# Altium PCB Square.PcbDoc
Units mm, origin at the board's own origin, x right, y up, seen from the top; angles counter-clockwise.
Board outline 76.5 x 60.89 mm, 2 copper layers (Top Layer, Bottom Layer); 6 components, 20 nets, 52 pads, 23 vias.
Unrouted connection lines stored in the file: 2.
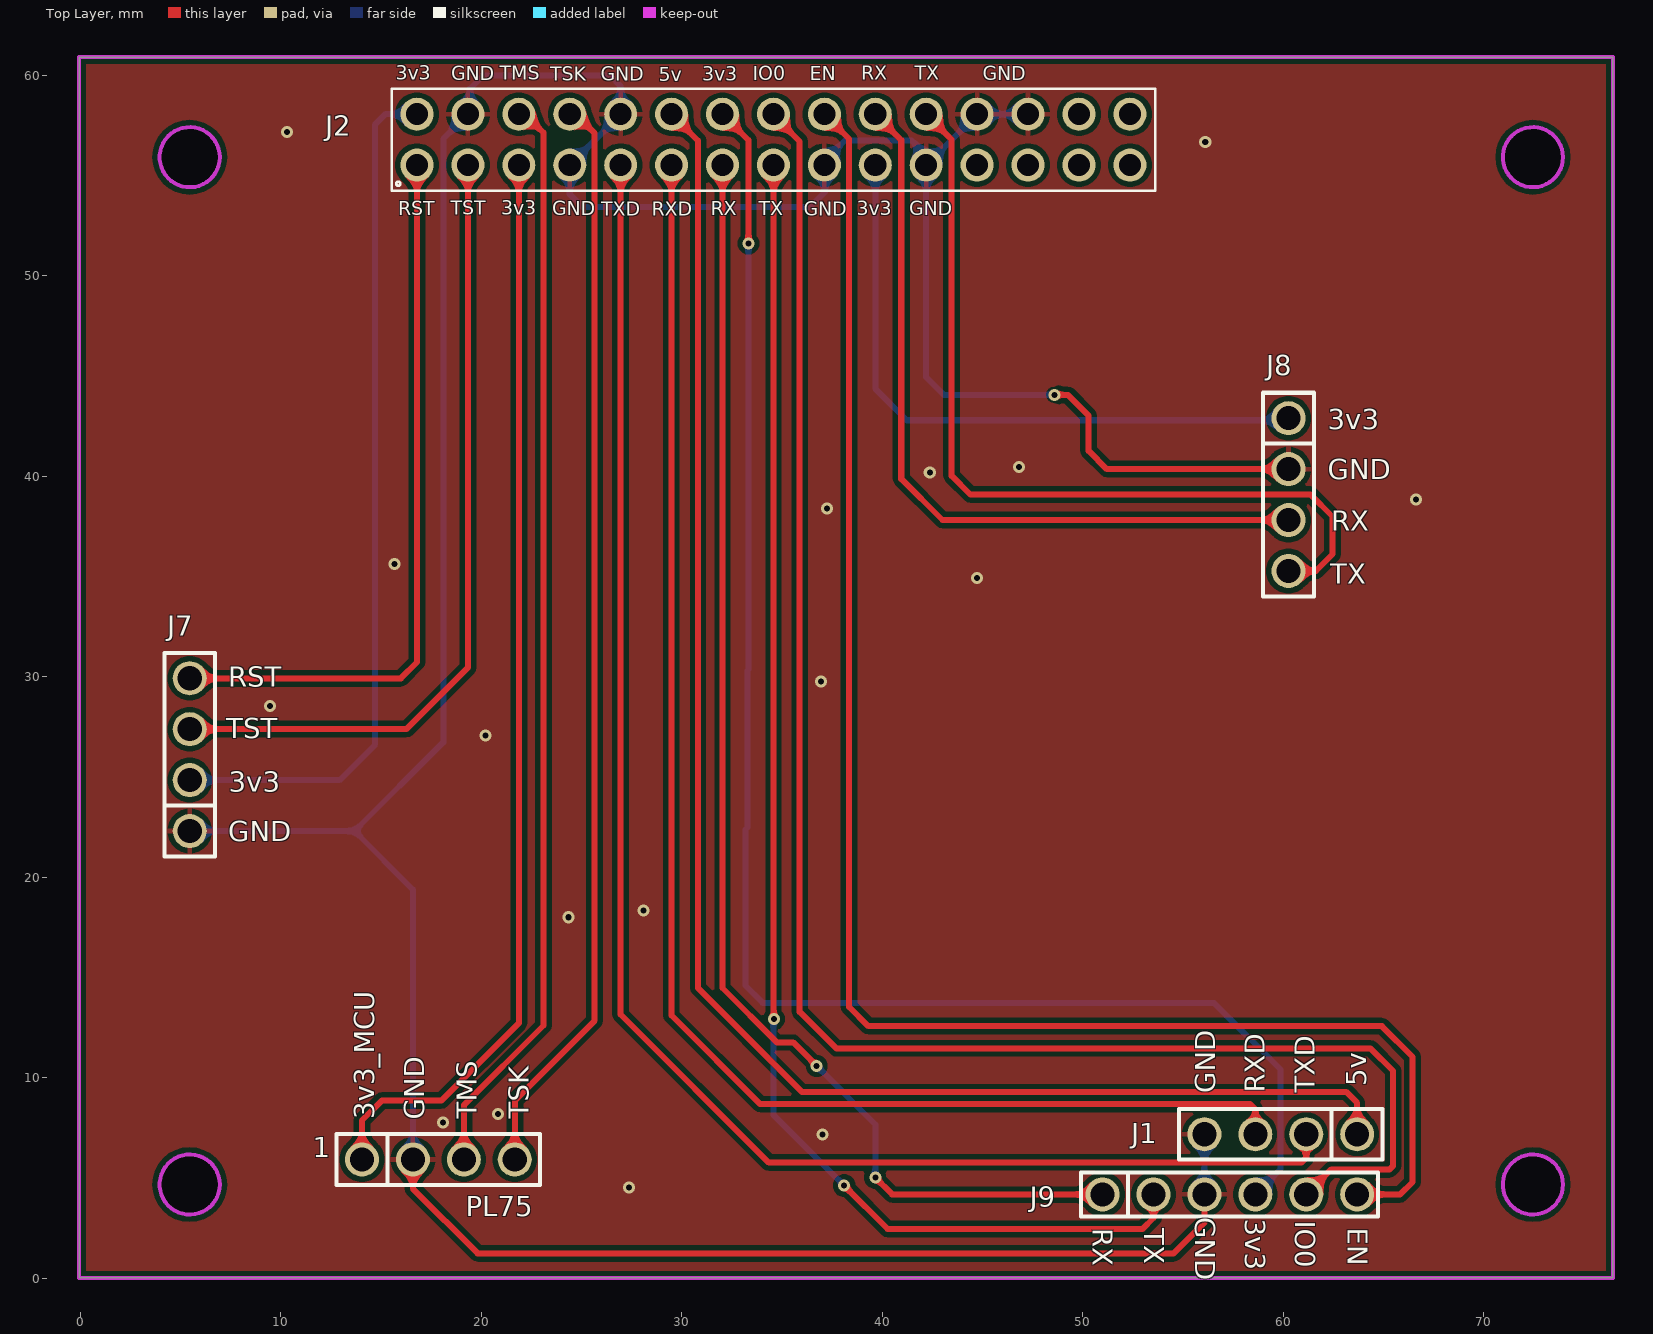
[diagram p0: Top Layer view]
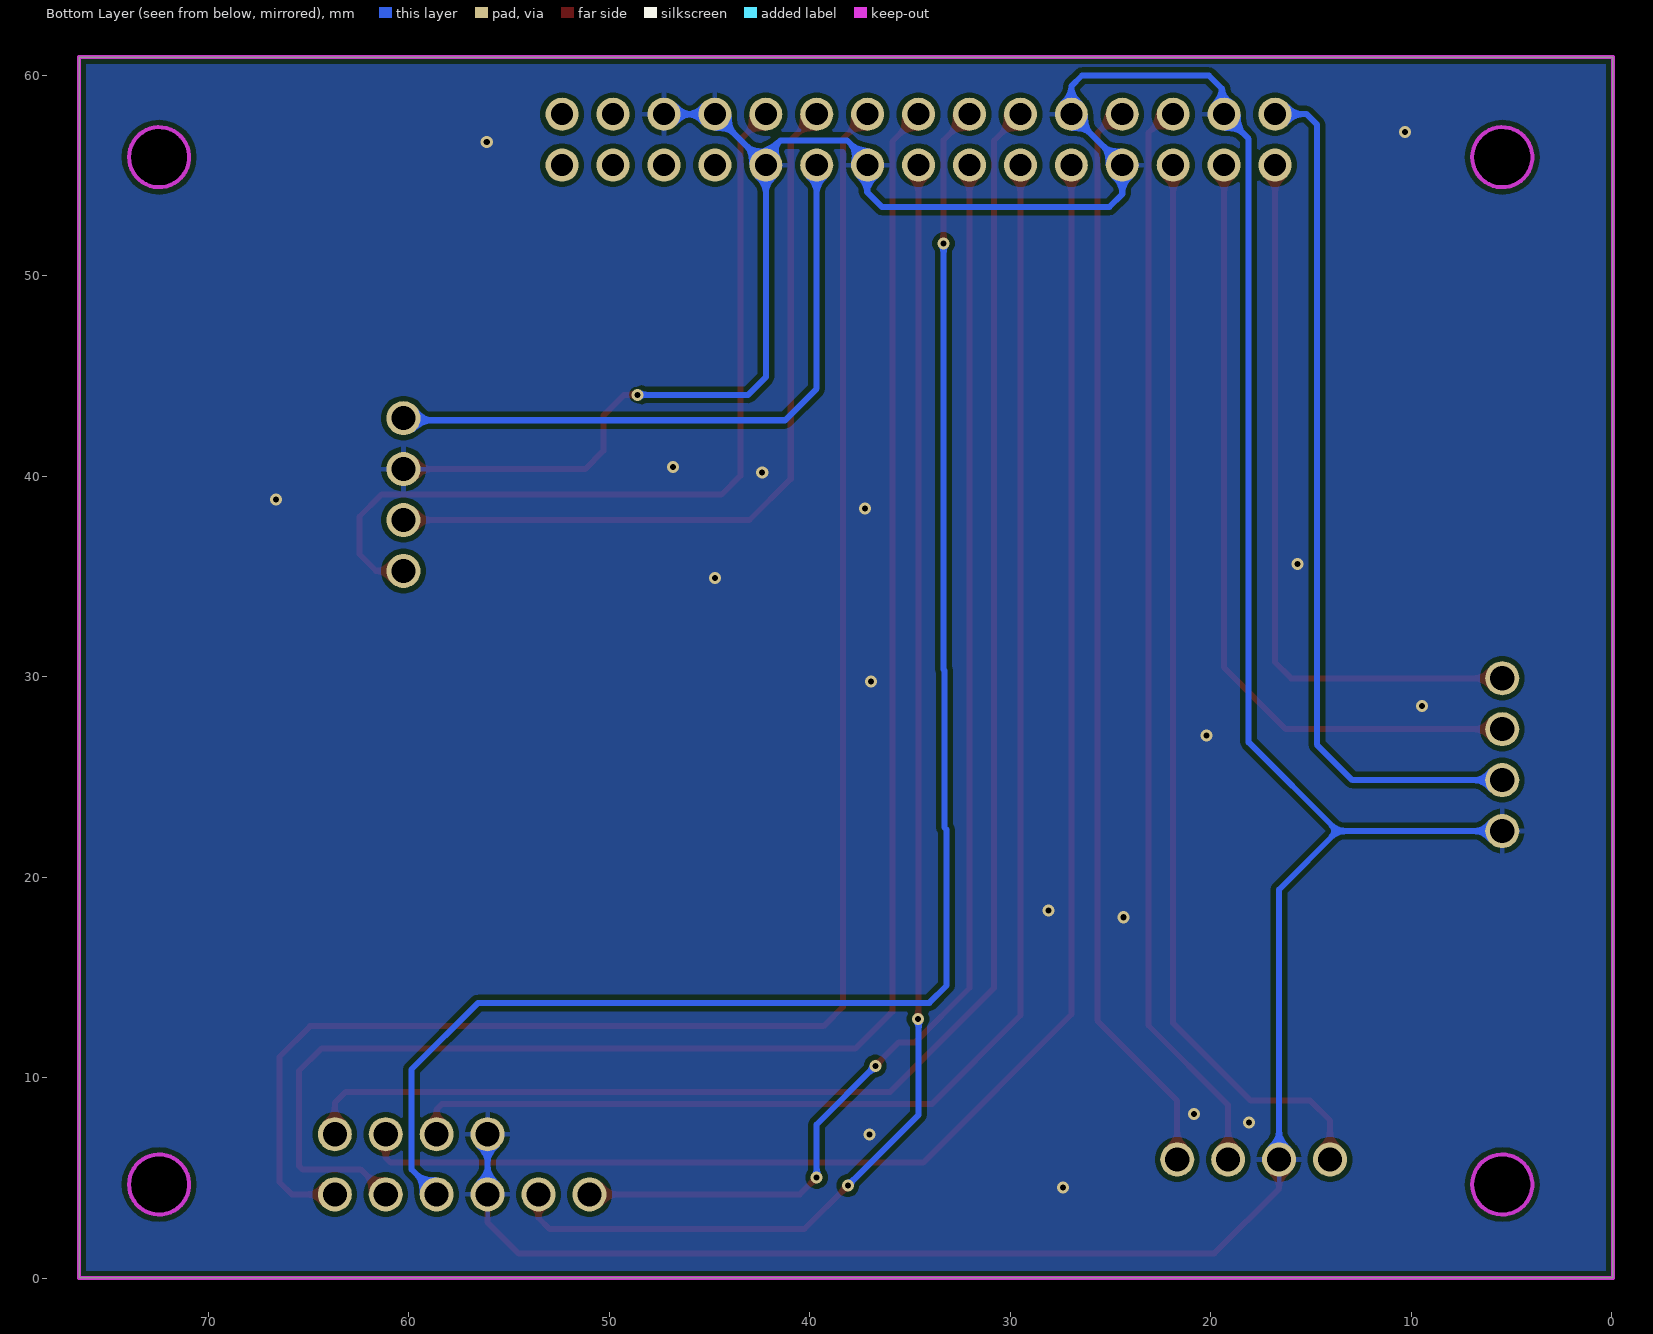
[diagram p1: Bottom Layer view, seen from below]

## Layer stack, top to bottom
Top Solder: solder mask 0.0102, Solder Resist, Dk 3.5
Top Layer: signal copper 0.0356
Dielectric 1: dielectric 0.32, FR-4, Dk 4.8
Bottom Layer: signal copper 0.0356
Bottom Solder: solder mask 0.0102, Solder Resist, Dk 3.5

## Board outline
-0.06,0.017 76.438,0.017 76.438,60.909 -0.06,60.909
cut-out: 70.952,4.676 ccw(c72.452,4.676) 72.452,3.176 ccw(c72.452,4.676) 73.952,4.676 ccw(c72.452,4.676) 72.452,6.176 ccw(c72.452,4.676)
cut-out: 70.952,55.921 ccw(c72.452,55.921) 72.452,54.421 ccw(c72.452,55.921) 73.952,55.921 ccw(c72.452,55.921) 72.452,57.421 ccw(c72.452,55.921)
cut-out: 3.952,4.676 ccw(c5.452,4.676) 5.452,3.176 ccw(c5.452,4.676) 6.952,4.676 ccw(c5.452,4.676) 5.452,6.176 ccw(c5.452,4.676)
cut-out: 5.452,54.421 cw(c5.452,55.921) 3.952,55.921 cw(c5.452,55.921) 5.452,57.421 cw(c5.452,55.921) 6.952,55.921 cw(c5.452,55.921)

## Design rules (kind name [scope] priority, off if disabled: settings)
Clearance [All] p1: gap=0.254 ignorepadtopadclearanceinfootprint=FALSE
PolygonConnect [All] p1: thpad.connectstyle=Relief thpad.reliefconductorwidth=0.254 thpad.reliefentries=4 thpad.polygonreliefangle="90 Angle" thpad.airgapwidth=0.254 smdpad.connectstyle=Relief smdpad.reliefconductorwidth=0.254 smdpad.reliefentries=4 smdpad.polygonreliefangle="90 Angle" smdpad.airgapwidth=0.254 via.connectstyle=Direct via.reliefconductorwidth=0.254 via.reliefentries=4 via.polygonreliefangle="90 Angle" via.airgapwidth=0.254
RoutingVias [All] p1: holewidth=0.3 width=0.6 viastyle="Through Hole" minholewidth=0.3 minwidth=0.6 maxholewidth=0.3 maxwidth=0.6
SolderMaskExpansion [All] p1: expansion=0.102 istentingtop=FALSE
Width [All] p1: maxlimit=1 minlimit=0.3 preferedwidth=0.3
30 further rules are at their usual default settings.

## Classes and differential pairs
component class Sheet1: 1 J2 J7 J8 J9

## Components (designator, comment, footprint, x,y, rotation, side; value= is the part's Value field where it differs from the comment)
1 "J" J4#1 14.047,5.926 r0 top
J1 "Comment" J4#2 63.686,7.183 r180 top
J2 "61303021121" 61303021121 34.569,56.794 r0 top
J7 "J" J4#1 5.453,22.309 r90 top
J8 "J" J4#1 60.263,42.901 r270 top
J9 "J" J6 50.986,4.183 r0 top

## Footprints (in the part's own frame and the unit in brackets; to place one, negate y for a bottom-side part, rotate by r counter-clockwise, add the part's x,y. Pads: shape width x height; smd on the part's side, far side on the other; paste and mask are expansions set on the pad)
61303021121 [mm]
  round 1.65 hole 1.1: 1(-17.78,-1.27) 2(-17.78,1.27) 3(-15.24,-1.27) 4(-15.24,1.27) 5(-12.7,-1.27) 6(-12.7,1.27) 7(-10.16,-1.27) 8(-10.16,1.27) 9(-7.62,-1.27) 10(-7.62,1.27) 11(-5.08,-1.27) 12(-5.08,1.27) 13(-2.54,-1.27) 14(-2.54,1.27) 15(0,-1.27) 16(0,1.27) 17(2.54,-1.27) 18(2.54,1.27) 19(5.08,-1.27) 20(5.08,1.27) 21(7.62,-1.27) 22(7.62,1.27) 23(10.16,-1.27) 24(10.16,1.27) 25(12.7,-1.27) 26(12.7,1.27) 27(15.24,-1.27) 28(15.24,1.27) 29(17.78,-1.27) 30(17.78,1.27)
  silkscreen extent -19.05,-2.54 19.05,2.54
J4#1 [mm]
  round 1.7 hole 1.2: 1(0,0) 2(2.54,0) 3(5.08,0) 4(7.62,0)
  Bottom Layer lines w0.3: 7.617,0.09 7.617,0.284
  Bottom Layer lines w0.4: -0.033,0.065 0,0.099
  silkscreen extent -1.27,-1.27 8.89,1.27
J4#2 [mm]
  round 1.7 hole 1.2: 1(0,0) 2(2.54,0) 3(5.08,0) 4(7.62,0)
  silkscreen extent -1.27,-1.27 8.89,1.27
J6 [mm]
  round 1.7 hole 1.2: 1(0,0) 2(2.54,0) 3(5.08,0) 4(7.62,0) 5(10.16,0) 6(12.7,0)
  Top Layer lines w0.2: 10.16,0.125 10.181,0.104 ; 10.16,0.125 10.181,0.104 ; 10.16,0.125 10.181,0.104 ; 10.16,0.125 10.181,0.104 ; 10.181,0.104 10.223,0.063 ; 10.181,0.104 10.223,0.063 ; 10.181,0.104 10.223,0.063 ; 10.181,0.104 10.223,0.063 ; 10.223,0.063 10.223,0.063 ; 10.223,0.063 10.223,0.063 ; 10.223,0.063 10.223,0.063 ; 10.223,0.063 10.223,0.063 ; 10.223,0.063 10.223,0.063 ; 10.223,0.063 10.223,0.063 ; 10.223,0.063 10.223,0.063 ; 10.223,0.063 10.223,0.063 ; 10.223,0.063 10.223,0.063 ; 10.223,0.063 10.223,0.063 ; 10.223,0.063 10.277,0.008 ; 10.223,0.063 10.277,0.008 ; 10.223,0.063 10.223,0.063 ; 10.223,0.063 10.223,0.063 ; 10.223,0.063 10.223,0.063 ; 10.223,0.063 10.277,0.008 ; 10.223,0.063 10.223,0.063 ; 12.727,-0.042 12.727,0 ; 12.727,-0.042 12.727,0 ; 12.727,-0.042 12.727,0 ; 12.727,-0.042 12.727,0 ; 12.727,0 12.727,0.015 ; 12.727,0 12.727,0.015 ; 12.727,0 12.727,0.015 ; 12.727,0 12.727,0.015
  silkscreen extent -1.07,-1.09 13.74,1.09

## Part data
1 J7 J8: library part J4
J2: "<b> WR-PHD 2.54mm Dual Pin Header, 30 Pins </b>=>Code : Con_BTB_PHD_2.54_2_61303021121 <br><a href=\"http://katalog.we-online.de/media/images/eican/Con_BTB_PHD_2.54_2_6130xx21121_pf2.jpg\" title=\"Enlarge picture\"> <img src=\"http://katalog.we-online.de/media/thumbs2/eican/thb_Con_BTB_PHD_2.54_2_6130xx21121_pf2.jpg\" width=\"320\"></a><p> Details see: <a href=\"http://katalog.we-online.de/en/em/613_0xx_211_21\">http://katalog.we-online.de/en/em/613_0xx_211_21</a><p> Created 2014-05-29, Karrer Zheng<br> 2014 (C) WÃ¼rth Elektronik", Package=None, Availability=Unavailable, MF="{'manufacturer': u'Wurth Elektronik'}", MP=61303021121, Price=None
J9: library part J6

## Via types
v1: diameter 0.6, hole 0.3, Top Layer to Bottom Layer, tented both sides, 23 vias

## Nets (pads, with @x,y where several pads share a name; then routed paths per layer and width w, separated by ;. In a path a pad name is that pad's centre, name@x,y a point inside that pad or via, vN(x,y) a via of type N, cw(c..) or ccw(c..) an arc to the next point about the centre after c; other vN are vias at no path point)
3V3: J2.2 J2.14 J2.19 J7.2 J8.1 J9.4 | length 155.3
  Top Layer w0.3: J2.14@32.085,58.12 J2.14 33.325,56.769 v1(33.325,51.613) ; J9.4@58.606,3.902 J9.4
  Bottom Layer w0.3: J7.2 12.936,24.849 14.707,26.619 14.707,57.556 15.215,58.064 J2.2 ; v1(33.325,51.613) 33.325,33.782 33.325,30.378 33.274,30.328 33.274,22.477 33.172,22.375 33.172,14.605 34.036,13.741 56.54,13.741 59.86,10.422 59.86,5.437 J9.4 ; J2.19 39.649,44.374 41.224,42.799 60.161,42.799 J8.1
3V3_MCU: 1.1 J2.5 | length 54.6
  Top Layer w0.3: 1.1 14.047,7.875 15.037,8.865 18.009,8.865 21.869,12.725 J2.5
+5: J1.1 J2.12 | length 81
  Top Layer w0.3: J2.12 30.8,56.753 30.8,14.487 35.987,9.3 63.141,9.3 63.686,8.755 J1.1
EN_J9: J2.18 J9.6 | length 83.6
  Top Layer w0.3: J2.18@37.241,58.196 J2.18 38.338,56.835 38.338,13.54 39.305,12.573 64.922,12.573 66.446,11.049 66.446,4.799 65.831,4.183 63.713,4.183 J9.6
GND: 1.2 J1.4 J2.4 J2.7 J2.10 J2.17 J2.21 J2.24 J2.26 J7.1 J8.2 J9.3 | length 185.9
  Top Layer w0.3: 1.2 16.587,4.47 19.812,1.245 54.534,1.245 56.066,2.777 J9.3 ; v1(48.59,44.069) 49.251,44.069 50.292,43.028 50.292,41.273 51.204,40.361 J8.2
  Bottom Layer w0.3: J7.1 13.673,22.309 ; 1.2 16.587,19.394 13.673,22.309 ; J2.26 J2.24 J2.21 ; v1(48.59,44.069) 43.068,44.069 42.189,44.947 J2.21 ; J9.3 J1.4 ; 13.673,22.309 18.1,26.736 18.1,56.835 J2.4 19.436,58.171 19.436,59.339 20.091,59.995 26.416,59.995 26.949,59.461 J2.10 J2.7 24.409,54.077 25.044,53.442 36.398,53.442 37.135,54.178 37.135,55.499 J2.17 37.109,55.728 38.135,56.753 41.468,56.753 41.931,56.291 41.931,55.783 J2.21
  other v1: 27.356,4.521 37.023,7.162 18.088,7.76 20.828,8.204 24.359,18.009 28.092,18.339 20.218,27.076 9.449,28.55 36.931,29.758 44.729,34.92 15.672,35.636 37.236,38.405 66.624,38.837 42.367,40.183 46.812,40.462 56.109,56.667 10.312,57.175
IO0_J9: J2.16 J9.5 | length 86
  Top Layer w0.3: J2.16@34.569,58.014 35.88,56.703 35.88,13.294 37.719,11.455 64.364,11.455 65.481,10.338 65.481,5.613 65.305,5.437 62.4,5.437 61.209,4.246 J9.5 61.146,4.308 J9.5@61.146,4.453
NetJ2_1_23: 
NetJ2_1_25: 
NetJ2_23: J2.23
NetJ2_25: J2.25
RST_J7: J2.1 J7.4 | length 36.5
  Top Layer w0.3: J7.4 15.984,29.929 16.789,30.734 J2.1
RX_J8: J2.20 J8.3 | length 38.9
  Top Layer w0.3: J2.20 40.945,56.769 40.945,39.878 43.002,37.821 J8.3
RX_J9: J2.13 J9.1 | length 65.8
  Top Layer w0.3: J2.13 32.029,14.478 34.74,11.767 35.553,11.767 v1(36.728,10.592) ; v1(39.649,5.029) 40.496,4.183 J9.1
  Bottom Layer w0.3: v1(36.728,10.592) 39.649,7.671 v1(39.649,5.029)
RXD_J1: J1.3 J2.11 | length 74.7
  Top Layer w0.3: J2.11 29.489,13.106 33.909,8.687 58.344,8.687 58.606,8.425 J1.3
TMS: 1.3 J2.6 | length 54.5
  Top Layer w0.3: 1.3 19.127,8.637 23.098,12.608 23.098,57.14 22.174,58.064 J2.6
TSK: 1.4 J2.8 | length 54.5
  Top Layer w0.3: 1.4 21.667,8.865 25.654,12.852 25.654,57.125 24.714,58.064 J2.8
TST_J7: J2.3 J7.3 | length 40.6
  Top Layer w0.3: J7.3 16.263,27.389 19.329,30.455 J2.3
  Bottom Layer w0.2: J7.3 J7.3@5.832,27.389
TX_J8: J2.22 J8.4 | length 42.8
  Top Layer w0.3: J2.22 43.459,56.794 43.459,40.03 44.399,39.091 61.366,39.091 62.459,37.998 62.459,36.119 61.621,35.281 J8.4
TX_J9: J2.15 J9.2 | length 70.1
  Top Layer w0.3: J2.15 34.582,55.512 34.582,12.941 v1(34.595,12.929) ; v1(38.1,4.623) 40.259,2.464 52.984,2.464 53.526,3.006 J9.2
  Bottom Layer w0.3: v1(34.595,12.929) 34.569,12.903 34.569,8.153 v1(38.1,4.623)
TXD_J1: J1.2 J2.9 | length 80.9
  Top Layer w0.3: J2.9 26.949,13.157 34.341,5.766 60.909,5.766 61.146,6.003 J1.2
pads on no net: J2.27 J2.28 J2.29 J2.30

## Polygon pours and split planes (outlines as drawn)
GND on Top Layer "GND_L01_P000" (solid, pour order 0): -0.051,60.884 76.429,60.884 76.429,0.025 -0.051,0.025 -0.051,0.559
GND on Bottom Layer "GND_L02_P001" (solid, pour order 1): -0.051,60.884 76.429,60.884 76.429,0.025 -0.051,0.025 -0.051,0.559

## Keep-outs
Keep-Out Layer:
  circle w0.2: c72.452,4.676 r1.5
  circle w0.2: c72.452,55.921 r1.5
  circle w0.2: c5.452,55.921 r1.5
  circle w0.2: c5.452,4.676 r1.5
  lines w0.2: -0.06,0.017 76.438,0.017 76.438,8.509 76.438,12.244 76.438,60.909 -0.06,60.909 -0.06,0.017

## Silkscreen, mask and mechanical layers (free items; w line width, h text height)
Top Overlay:
  text "3v3" at 15.723,59.792 h0.7
  text "TMS" at 20.93,59.792 h0.7
  text "RX" at 38.938,59.792 h0.7
  text "TX" at 41.631,59.792 h0.7
  text "GND" at 18.491,59.766 h0.7
  text "IO0" at 33.528,59.766 h0.7
  text "EN" at 36.373,59.766 h0.7
  text "GND" at 45.009,59.766 h0.7
  text "TSK" at 23.444,59.741 h0.7
  text "GND" at 25.959,59.741 h0.7
  text "3v3" at 31.013,59.741 h0.7
  text "5v" at 28.854,59.715 h0.7
  text "TST" at 18.466,53.061 h0.7
  text "3v3" at 20.98,53.061 h0.7
  text "RST" at 15.85,53.035 h0.7
  text "GND" at 23.546,53.035 h0.7
  text "RX" at 31.445,53.035 h0.7
  text "TX" at 33.833,53.035 h0.7
  text "3v3" at 38.735,53.035 h0.7
  text "GND" at 41.351,53.035 h0.7
  text "TXD" at 25.984,53.01 h0.7
  text "RXD" at 28.499,53.01 h0.7
  text "GND" at 36.093,53.01 h0.7
  text "3v3" at 62.23,42.342 h1
  text "GND" at 62.23,39.853 h1
  text "RX" at 62.382,37.287 h1
  text "TX" at 62.332,34.646 h1
  text "RST" at 7.366,29.515 h1
  text "TST" at 7.264,26.949 h1
  text "3v3" at 7.391,24.257 h1
  text "GND" at 7.366,21.793 h1
  text "5v" at 64.135,9.576 h1 r90
  text "RXD" at 59.08,9.246 h1 r90
  text "TXD" at 61.57,9.246 h1 r90
  text "GND" at 56.617,9.22 h1 r90
  text "TMS" at 19.761,7.95 h1 r90
  text "TSK" at 22.352,7.95 h1 r90
  text "3v3_MCU" at 14.667,7.925 h1 r90
  text "GND" at 17.145,7.899 h1 r90
  text "PL75" at 19.228,3.099 h1
  text "GND" at 55.601,3.048 h1 r270
  text "3v3" at 58.115,2.972 h1 r270
  text "IO0" at 60.604,2.87 h1 r270
  text "EN" at 63.221,2.515 h1 r270
  text "RX" at 50.495,2.489 h1 r270
  text "TX" at 53.061,2.489 h1 r270